# EAGLE board PowerBricksBoard1 (EAGLE 9.5.0)

Size 76.2 x 38.1 mm. Coordinates in mm from the lower left corner, seen from the top.
Outline: 0,0 76.2,0 76.2,38.1 0,38.1 0,0
Copper layers (1*16): Top 0.035mm / dielectric 1.5mm / Bottom 0.035mm
Design rules "default": minimum track width 6mil, minimum drill 0.35mm, track to track 6mil, track to pad 6mil, pad to pad 6mil, via to via 6mil, smd to smd 6mil, copper to edge 40mil, drill to drill 6mil, minimum pad ring 10mil, minimum via ring 8mil, stop-mask expansion 4mil, vias tented up to drill 0mil, thermal gap 10mil

## Footprints (pad centres in the part's own frame; a part is rotated, then mirrored left to right if it is on the bottom)
Q48SC12050NRDH = drill 1.6: P$1 0,0; P$2 0,3.81; P$3 0,7.62; P$4 0,15.24; P$6 50.8,7.62; P$7 50.8,3.81; P$8 50.8,11.43 | drill 2.1: P$5 50.8,0; P$9 50.8,15.24 | drill 1.2: P$10 53.34,7.62; P$11 53.34,5.62; P$12 53.34,3.62; P$13 53.34,9.62; P$14 53.34,11.62; P$15 53.34,13.62; P$16 53.34,1.62
UCM1H331MNL1GS = smd 3 x 5: P$1 0,-4.5; P$2 0,4.5
BRICKBOARD_TSW_14X2 = drill 1 pad 1.676: 1 0,2.54; 2 0,0; 3 2.54,2.54; 4 2.54,0; 5 5.08,2.54; 6 5.08,0; 7 7.62,2.54; 8 7.62,0; 9 10.16,2.54; 10 10.16,0; 11 12.7,2.54; 12 12.7,0; 13 15.24,2.54; 14 15.24,0; 15 17.78,2.54; 16 17.78,0; 17 20.32,2.54; 18 20.32,0; 19 22.86,2.54; 20 22.86,0; 21 25.4,2.54; 22 25.4,0; 23 27.94,2.54; 24 27.94,0; 25 30.48,2.54; 26 30.48,0; 27 33.02,2.54; 28 33.02,0; 29 0,71.12; 30 0,68.58; 31 2.54,71.12; 32 2.54,68.58; 33 5.08,71.12; 34 5.08,68.58; 35 7.62,71.12; 36 7.62,68.58; 37 10.16,71.12; 38 10.16,68.58; 39 12.7,71.12; 40 12.7,68.58; 41 15.24,71.12; 42 15.24,68.58; 43 17.78,71.12; 44 17.78,68.58; 45 20.32,71.12; 46 20.32,68.58; 47 22.86,71.12; 48 22.86,68.58; 49 25.4,71.12; 50 25.4,68.58; 51 27.94,71.12; 52 27.94,68.58; 53 30.48,71.12; 54 30.48,68.58; 55 33.02,71.12; 56 33.02,68.58

## Placement (x,y rotation side)
U$1  Q48SC12050NRDH  [Q48SC12050NRDH]  13.02,11.43 0 top
U$2  UCM1H331MNL1GS  [UCM1H331MNL1GS]  -17.78,45.72 0 top  (outside the outline)
U$3  UCM1H331MNL1GS  [UCM1H331MNL1GS]  -27.94,45.72 0 top  (outside the outline)
U$4  UCM1H331MNL1GS  [UCM1H331MNL1GS]  12.7,20.32 0 top
U$5  BRICKBOARD_TSW_14X2  [BRICKBOARD_TSW_14X2]  2.4,35 270 top

## Library data of the parts
U$1 = Q48SC12050NRDH
U$2-U$4 = UCM1H331MNL1GS
U$5 = Brickboard_Connector

## Nets
12_GND: U$1.P$5 U$5.45 U$5.46 U$5.47 U$5.48 U$5.49 U$5.50 U$5.51 U$5.52 U$5.53 U$5.54 U$5.55 U$5.56
12V: U$1.P$9 U$5.33 U$5.34 U$5.35 U$5.36 U$5.37 U$5.38 U$5.39 U$5.40 U$5.41 U$5.42 U$5.43 U$5.44
48_GND: U$1.P$1 U$2.P$2 U$3.P$2 U$4.P$2 U$5.15 U$5.16 U$5.17 U$5.18 U$5.19 U$5.20 U$5.21 U$5.22 U$5.23 U$5.24 U$5.25 U$5.26 U$5.27 U$5.28
48V: U$1.P$4 U$2.P$1 U$3.P$1 U$4.P$1 U$5.3 U$5.4 U$5.5 U$5.6 U$5.7 U$5.8 U$5.9 U$5.10 U$5.11 U$5.12 U$5.13 U$5.14
ALERT: U$1.P$10 U$5.31
CLK: U$1.P$13 U$5.30
DATA: U$1.P$11 U$5.32
ON/OFF: U$1.P$3 U$5.1

## Tracks (layer width: path | path; a pad name or v marks a point on that pad's centre or on a via)
12_GND  (12 unrouted)
12V  (12 unrouted)
48_GND  (17 unrouted)
48V  (15 unrouted)
ALERT  (1 unrouted)
CLK  (1 unrouted)
DATA  (1 unrouted)
ON/OFF  (1 unrouted)